# Altium PCB HCHO_Benchmark_B4.PcbDoc
Units mm, origin at the board's own origin, x right, y up, seen from the top; angles counter-clockwise.
Board outline 87.75 x 66 mm, 2 copper layers (Top Layer, Bottom Layer); 49 components, 43 nets, 151 pads, 71 vias.
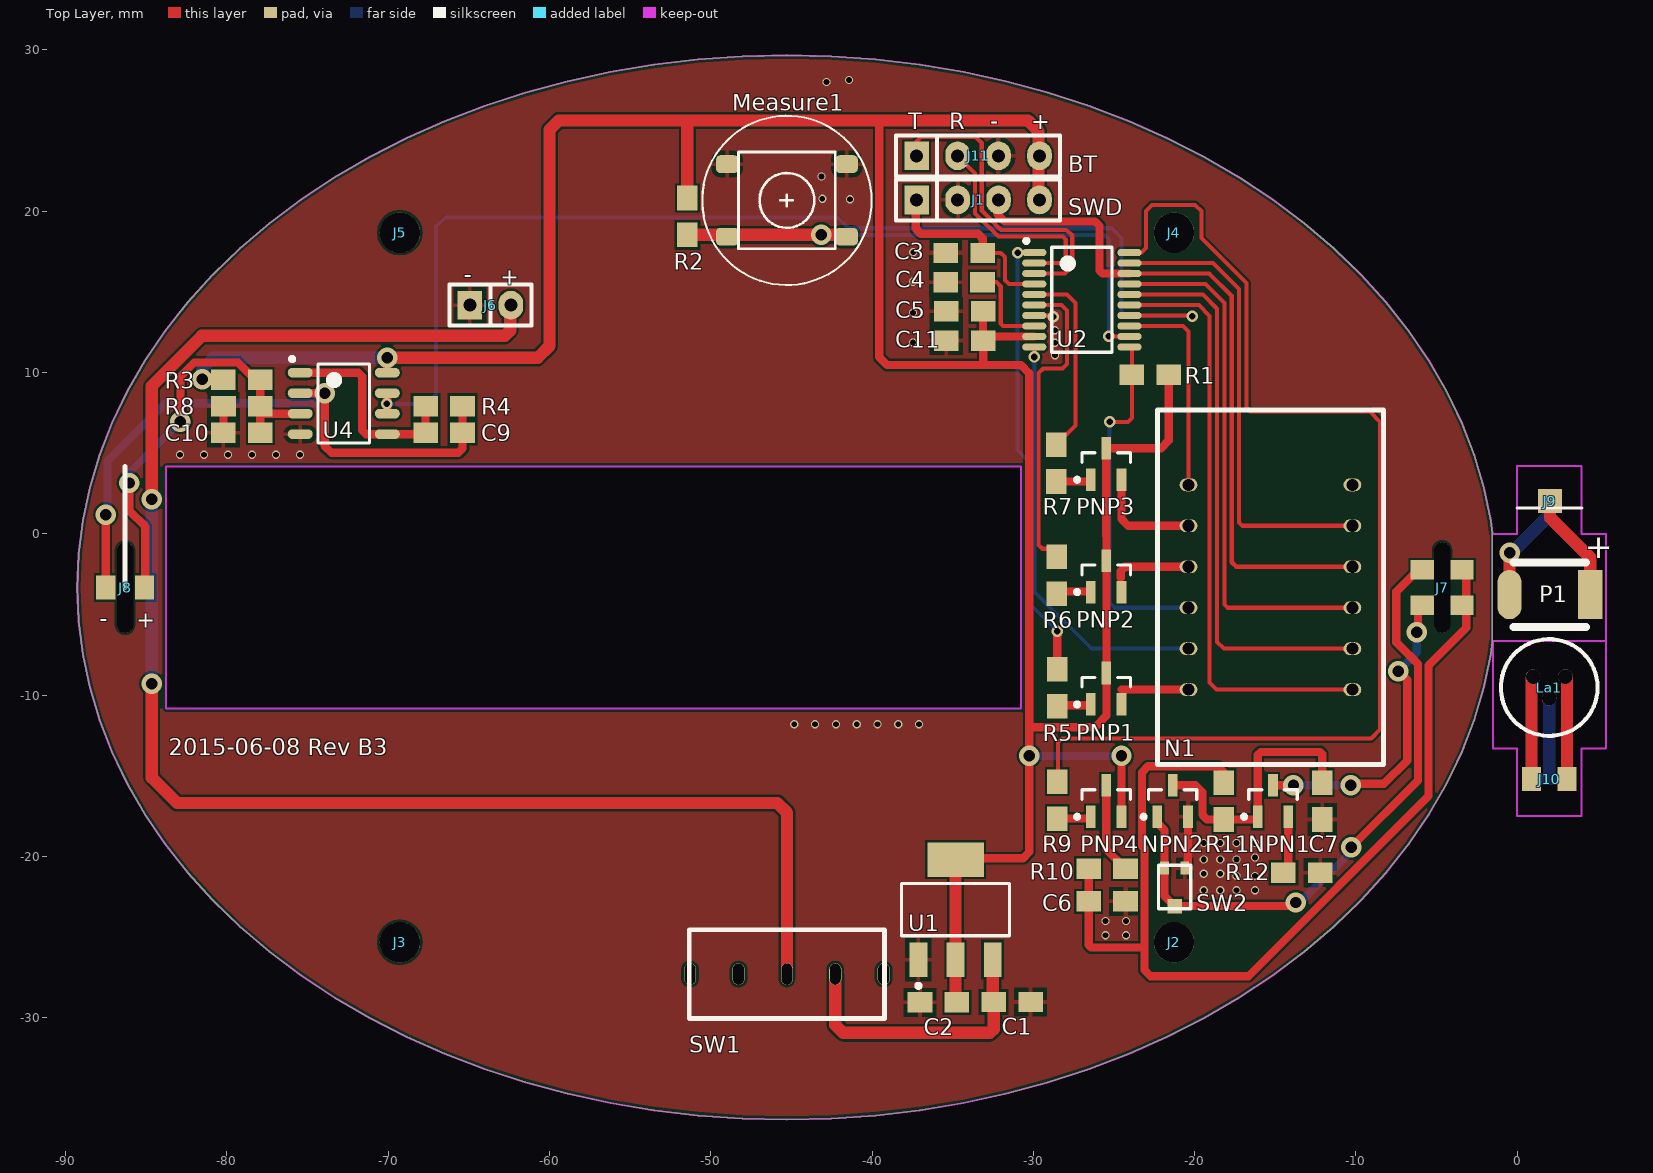
[diagram p0: Top Layer view]
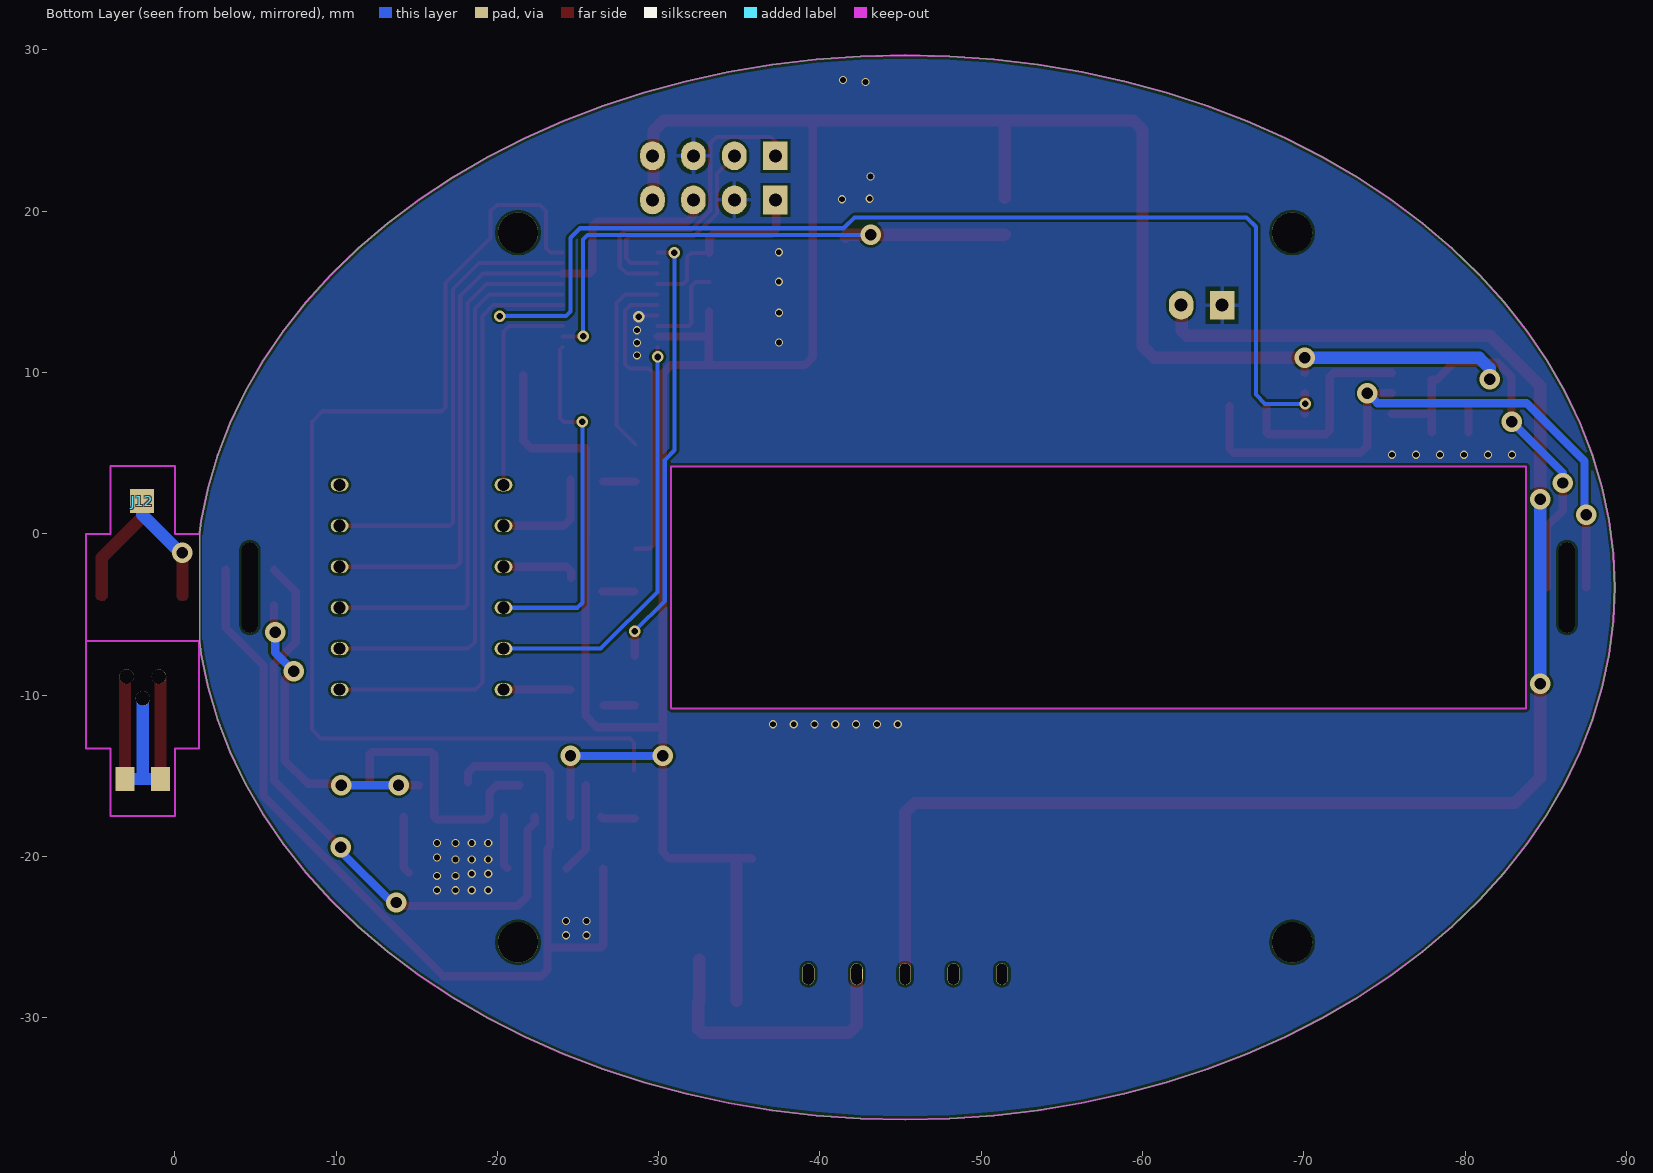
[diagram p1: Bottom Layer view, seen from below]

## Layer stack, top to bottom
Top Layer: signal copper 0.0356
Dielectric: dielectric 0.32, FR-4, Dk 4.8
Bottom Layer: signal copper 0.0356

## Board outline
-82.431,-21.011 -83.838,-19.226 -85.093,-17.379 -86.191,-15.476 -87.127,-13.526 -87.898,-11.535 -88.501,-9.512 -88.933,-7.464 -89.194,-5.4 -89.28,-3.328 -89.194,-1.256 -88.933,0.808 -88.501,2.855 -87.898,4.878 -87.127,6.869 -86.191,8.82 -85.093,10.722 -83.838,12.57 -82.431,14.354 -80.877,16.069 -79.183,17.707 -77.355,19.262 -75.4,20.728 -73.327,22.099 -71.143,23.369 -68.857,24.535 -66.477,25.59 -64.015,26.531 -61.478,27.354 -58.877,28.057 -56.223,28.635 -53.525,29.087 -50.795,29.412 -48.043,29.607 -45.28,29.672 -42.518,29.607 -39.766,29.412 -37.036,29.087 -34.338,28.635 -31.684,28.057 -29.083,27.354 -26.546,26.531 -24.083,25.59 -21.704,24.535 -19.418,23.369 -17.234,22.099 -15.16,20.728 -13.206,19.262 -11.378,17.707 -9.684,16.069 -8.13,14.354 -6.723,12.57 -5.468,10.722 -4.37,8.82 -3.434,6.869 -2.663,4.878 -2.06,2.855 -1.627,0.808 -1.531,0.045 -1.531,0.04 -1.531,-6.703 -1.627,-7.464 -2.06,-9.512 -2.663,-11.535 -3.434,-13.526 -4.37,-15.476 -5.468,-17.379 -6.723,-19.226 -8.13,-21.011 -9.684,-22.725 -11.378,-24.363 -13.206,-25.918 -15.16,-27.384 -17.234,-28.755 -19.418,-30.026 -21.704,-31.191 -24.083,-32.246 -26.546,-33.188 -29.083,-34.011 -31.684,-34.713 -34.338,-35.292 -37.036,-35.744 -39.766,-36.068 -42.518,-36.263 -45.28,-36.328 -48.043,-36.263 -50.795,-36.068 -53.525,-35.744 -56.223,-35.292 -58.877,-34.713 -61.478,-34.011 -64.015,-33.188 -66.477,-32.246 -68.857,-31.191 -71.143,-30.026 -73.327,-28.755 -75.4,-27.384 -77.355,-25.918 -79.183,-24.363 -80.877,-22.725
cut-out: -83.775,4.162 -83.768,4.155 -30.774,4.155 -30.774,-10.813 -30.79,-10.829 -83.775,-10.829

## Design rules (kind name [scope] priority, off if disabled: settings)
Clearance "6mil Special" [(HasFootprint('FPC 0.5mm 4P') OR HasFootprint('FPC 0.5mm 16P') OR HasFootprint('QFN40P500X500X90_HS-41L'))] p1: gap=0.152
Clearance "8mil all" [All] p2: gap=0.152
ComponentClearance [All] p1: gap=-100 collisioncheckmode=3 verticalgap=0.254 showdistances=FALSE
Height [All] p1: minheight=0 maxheight=50.8 prefheight=12.7
HoleSize [All] p1: absolutevalues=TRUE maxlimit=1817.048 minlimit=0 maxpercent=80.000 minpercent=20.000
HoleToHoleClearance [All] p1: gap=0.203 allowstackedmicrovias=TRUE
MinimumSolderMaskSliver [All] p1: minsoldermaskwidth=0
PolygonConnect PolygonConnect_1 [isvia] p1: connectstyle=Direct reliefconductorwidth=0.254 reliefentries=4 polygonreliefangle="90 Angle" airgapwidth=0.254
PolygonConnect [All] p2: connectstyle=Relief reliefconductorwidth=0.254 reliefentries=4 polygonreliefangle="90 Angle" airgapwidth=0.254
RoutingCorners [All] p1: cornerstyle=45-Degree minsetback=0.254 maxsetback=2.54
RoutingVias [All] p1: holewidth=0.356 width=0.508 viastyle="Through Hole" minholewidth=0.356 minwidth=0.508 maxholewidth=2.54 maxwidth=5.08
SilkToSilkClearance [All] p1: silktosilkclearance=0
SilkToSolderMaskClearance [IsPad] p1: minsilkscreentomaskgap=0 clearancetoexposedcopper=TRUE
SolderMaskExpansion [All] p1: expansion=0.102
Width 20mil_Power [(InNet('EP_SUPPLY&VBAT') OR InNet('PSUPPLY') OR InNet('P_3.3V') OR InNet('PSUPPLYBAT') OR InNet('P_3.3V') OR InNet('P_5V'))] p1: maxlimit=1000 minlimit=0.203 preferedwidth=0.508
Width 8mil_Basic [All] p2: maxlimit=100 minlimit=0.203 preferedwidth=0.254
20 further rules are at their usual default settings.

## Components (designator, comment, footprint, x,y, rotation, side; value= is the part's Value field where it differs from the comment)
C1 "10uf" C0805 -31.316,-29.029 r0 top
C2 "10uf" C0805 -35.886,-29.055 r180 top
C3 "1uf" C0805 -34.284,17.411 r0 top
C4 "1uf" C0805 -34.297,15.602 r0 top
C5 "1uf" C0805 -34.257,13.792 r180 top
C6 "1uf" C0805 -25.427,-22.792 r0 top
C7 "1uf" C0805 -12.092,-16.569 r270 top
C9 "1uf" C0805 -66.539,6.271 r0 top
C10 "10uf" C0805 -79.076,6.271 r180 top
C11 "10uf" C0805 -34.252,11.983 r180 top
J1 "CON4" CON4 -33.428,20.702 r0 top
J2 "CON1" 2.5MM -21.28,-25.328 r0 top
J3 "CON1" 2.5MM -69.28,-25.328 r0 top
J4 "CON1" 2.5MM -21.28,18.672 r0 top
J5 "CON1" 2.5MM -69.28,18.672 r0 top
J6 "CON2" CON2 -63.664,14.177 r0 top
J7 "CON2x2_PCB" CON2X2_PCB -4.654,-3.332 r270 top
J8 "CON1X2_PCB" CON1X2_PCB -86.315,-3.332 r90 top
J9 "CON1_PCB" CON1_PCB 2.032,2.032 r0 top
J10 "CON4_PCB" CON4_PCB 1.99,-15.205 r0 top
J11 "CON4" CON4 -33.428,23.436 r0 top
J12 "CON1_PCB" CON1_PCB 2.032,2.032 r0 bottom
La1 "Laser_Header" Laser_Header 1.983,-9.53 r180 top
Measure1 "Patch_6x6x5" PATCH6X6X5 -45.28,20.672 r180 top
N1 "LG3631BH" LG3631BH -15.298,-3.313 r90 top
NPN1 "8050" SOT23-3 -15.14,-16.569 r90 top
NPN2 "8050" SOT23-3 -21.363,-16.569 r90 top
P1 "photodetector" BPW34 2.025,-3.77 r180 top
PNP1 "8550" SOT23-3 -25.484,-9.604 r90 top
PNP2 "8550" SOT23-3 -25.484,-2.639 r90 top
PNP3 "8550" SOT23-3 -25.484,4.326 r90 top
PNP4 "8550" SOT23-3 -25.484,-16.569 r90 top
R1 "10K" R0805 -22.749,9.855 r0 top
R2 "10K" R0805 -51.452,19.678 r90 top
R3 "4.7K" R0805 -79.082,9.567 r180 top
R4 "4.3M" R0805 -66.539,7.923 r180 top
R5 "10K" R0805 -28.516,-9.545 r90 top
R6 "10K" R0805 -28.552,-2.578 r90 top
R7 "10K" R0805 -28.573,4.388 r90 top
R8 "1K" R0805 -79.072,7.923 r0 top
R9 "1K" R0805 -28.516,-16.512 r90 top
R10 "1K" R0805 -25.427,-20.76 r180 top
R11 "1K" R0805 -18.188,-16.569 r90 top
R12 "1K" R0805 -13.362,-21.014 r180 top
SW1 "SS12F44" SS12F44 -45.28,-27.298 r180 top
SW2 "TMC2K2J" TMC2K2J -21.236,-21.903 r180 top
U1 "1117-3.3" SOT223 -34.825,-23.3 r0 top
U2 "STM8S003F3P6" STM8S003F3P6 -26.99,14.511 r0 top
U4 "LMV358" LMV358_SOP -72.754,8.083 r0 top

## Footprints (in the part's own frame and the unit in brackets; to place one, negate y for a bottom-side part, rotate by r counter-clockwise, add the part's x,y. Pads: shape width x height; smd on the part's side, far side on the other; paste and mask are expansions set on the pad)
2.5MM [mm]
  round 2.5 hole 2.5 unplated: 1(0,0)
BPW34 [mm]
  rect 1.5x3.048 smd: A(-2.5,0)
  oval 1.5x3.048 smd: C(2.5,0)
  silkscreen extent -2.25,-2 2.25,2
C0805 [mil]
  rect 60x50 smd: 1(-45,0) 2(45,0)
  body extent -52,-25 55,25, height 31
CON1_PCB [mm]
  rect 1.5x1.5 smd: 1(0,0)
CON1X2_PCB [mm]
  oval 5.6x1 hole 1 slot 5.6 at 0 deg unplated: 0(0,0)
  rect 1.5x1.2 smd: 1(0,1.2) 2(0,-1.2)
CON2 [mil]
  rect 60x70 hole 32: 1(-50,0)
  oval 60x70 hole 32: 2(50,0)
  silkscreen extent -100,-50 100,50, body extent -101,-50 100,50, height 295
CON2X2_PCB [mm]
  oval 5.6x1 hole 1 slot 5.6 at 0 deg unplated: 0(0,0)
  rect 1.2x1.5 smd: 1(-1.1,1.2) 2(-1.1,-1.2) 3(1.1,-1.2) 4(1.1,1.2)
CON4 [mil]
  rect 60x70 hole 32: 1(-150,0)
  oval 60x70 hole 32: 2(-50,0) 3(50,0) 4(150,0)
  silkscreen extent -200,-50 200,50, body extent -201,-50 199,50, height 295
CON4_PCB [mm]
  rect 1.2x1.5 smd far side: 1(-1.1,0) 4(1.1,0)
  rect 1.2x1.5 smd: 2(-1.1,0) 3(1.1,0)
Laser_Header [mm]
  round 0.9 hole 0.9 unplated: 1(-1,-0.675) 2(1,-0.675) 3(0,0.675)
  silkscreen extent -3,-3 3,3, body extent -2.98,-2.99 3,2.99, height 16.7
LG3631BH [mm]
  oval 0.8x1.1 hole 0.75: 1(-6.35,-5.08) 2(-3.81,-5.08) 3(-1.27,-5.08) 4(1.27,-5.08) 5(3.81,-5.08) 6(6.35,-5.08) 7(6.35,5.08) 8(3.81,5.08) 9(1.27,5.08) 10(-1.27,5.08) 11(-3.81,5.08) 12(-6.35,5.08)
  silkscreen extent -11,-7 11,7, body extent -10.98,-6.99 10.99,7, height 7.3
LMV358_SOP [mm] "TSOP, 8-Leads, Body 3.00x3.00mm, Pitch 0.65mm, IPC Medium Density"
  oval 1.55x0.6 smd: 1(-2.7,1.905) 2(-2.7,0.635) 3(-2.7,-0.635) 4(-2.7,-1.905) 5(2.7,-1.905) 6(2.7,-0.635) 7(2.7,0.635) 8(2.7,1.905)
  silkscreen extent -3.32,-2.45 1.6,2.87, body extent -1.95,-2.47 1.93,2.46, height 1.1
PATCH6X6X5 [mm]
  rrect50% 1.4x1.1 smd: 1(-3.7,2.25) 2(3.7,2.25) 3(3.7,-2.25) 4(-3.7,-2.25)
  silkscreen extent -3,-3 3,3, body extent -4.13,-3 4.13,3, height 5
R0805 [mil]
  rect 60x50 smd: 1(-45,0) 2(45,0)
  body extent -52,-25 55,25, height 31
SOT23-3 [mm]
  rect 1.4x0.6 smd: 1(-0.975,0.95) 2(-0.975,-0.95) 3(0.975,0)
  silkscreen extent -1.1,-1.5 0.7,1.92, body extent -0.7,-1.5 0.7,1.5, height 1
SOT223 [mm]
  rect 1.1x2.15 smd: 1(-2.3,-3.1) 2(0,-3.1) 3(2.3,-3.1)
  rect 3.5x2.15 smd: 4(0,3.1)
  silkscreen extent -3.35,-4.85 3.35,1.63, body extent -3.3,-3.2 3.3,3.1, height 1.7
SS12F44 [mm]
  oval 0.75x1.35 hole 0.65 slot 1.3 at 90 deg: 1(-6,0) 2(-3,0) 3(0,0) 4(3,0) 5(6,0)
  silkscreen extent -6.05,-2.75 6.05,2.75, body extent -6.05,-2.75 6.05,2.75, height 11
STM8S003F3P6 [mm]
  oval 1.5x0.45 smd: 1(-2.95,2.925) 2(-2.95,2.275) 3(-2.95,1.625) 4(-2.95,0.975) 5(-2.95,0.325) 6(-2.95,-0.325) 7(-2.95,-0.975) 8(-2.95,-1.625) 9(-2.95,-2.275) 10(-2.95,-2.925) 11(2.95,-2.925) 12(2.95,-2.275) 13(2.95,-1.625) 14(2.95,-0.975) 15(2.95,-0.325) 16(2.95,0.325) 17(2.95,0.975) 18(2.95,1.625) 19(2.95,2.275) 20(2.95,2.925)
  silkscreen extent -3.57,-3.25 1.88,3.77, body extent -2.22,-3.25 2.2,3.24, height 1.2
TMC2K2J [mm]
  rect 0.55x0.8 smd: 1(0.625,-1.175) 2(-0.625,-1.175)
  rect 0.9x0.9 smd: 3(0,1.175)
  silkscreen extent -1,-1.35 1,1.35, body extent -1,-1.35 1.01,1.34, height 0.9

## Part data
C1 C2 C3 C4 C5 C6 C7 C9 C10 C11: library part C
NPN1 NPN2: library part NPN
PNP1 PNP2 PNP3 PNP4: library part PNP
R1 R2 R3 R4 R5 R6 R7 R8 R9 R10 R11 R12: library part R
U1: library part 1117

## Via types
v1: diameter 0.508, hole 0.356, Top Layer to Bottom Layer, 45 vias
v2: diameter 1.27, hole 0.711, Top Layer to Bottom Layer, 18 vias
v3: diameter 0.711, hole 0.406, Top Layer to Bottom Layer, 8 vias

## Nets (pads, with @x,y where several pads share a name; then routed paths per layer and width w, separated by ;. In a path a pad name is that pad's centre, name@x,y a point inside that pad or via, vN(x,y) a via of type N, cw(c..) or ccw(c..) an arc to the next point about the centre after c; other vN are vias at no path point)
C_LASER: R9.2 U2.20 | length 70.3
  Top Layer w0.254: R9.2@-28.475,-14.664 -28.475,-12.93 -28.236,-12.691 -9.05,-12.691 -8.502,-12.143 -8.502,6.932 -9.171,7.602 -16.55,7.602 -16.783,7.835 -16.783,15.544 -19.585,18.346 -19.585,20.007 -19.966,20.388 -22.633,20.388 -23.014,20.007 -23.014,17.721 -23.299,17.436 U2.20
GND: C1.2 C2.2 C3.1 C4.1 C5.2 C6.2 C7.2 C10.2 C11.2 J1.2 J6.1 J11.3 Measure1.3 Measure1.4 NPN2.2 R8.1 R12.1 SW2.2 U1.1 U2.7 U4.4 | length 6.1
  Top Layer w0.254: U2.7 -29.028,13.536 v3@-28.993,13.5
  Top Layer w0.508: C10.2@-80.215,6.275 R8.1 ; SW2.2 -20.413,-20.53 NPN2.2
  Bottom Layer w0.254: v3@-28.993,13.5 v3@-28.754,13.5
  other v1: -25.527,-24.892 -24.257,-24.892 -25.527,-24.003 -24.257,-24.003 -19.431,-22.098 -18.415,-22.098 -17.399,-22.098 -16.256,-22.098 -17.399,-21.209 -16.256,-21.209 -19.431,-21.082 -18.415,-21.082 -19.431,-20.193 -18.415,-20.193 -17.399,-20.193 -16.256,-20.066 -19.431,-19.177 -18.415,-19.177 -17.399,-19.177 -16.256,-19.177 -44.822,-11.811 -43.532,-11.811 -42.243,-11.811 -40.953,-11.811 -39.663,-11.811 -38.374,-11.811 -37.084,-11.811 -82.903,4.897 -81.417,4.897 -79.931,4.897 -78.445,4.897 -76.958,4.897 -75.472,4.897 -28.652,11.063 -37.465,11.862 -28.652,11.843 -28.652,12.623 -37.465,13.707 -37.454,15.628 -37.454,17.461 -41.372,20.743 -43.081,20.78 -43.131,22.152 -42.826,28.008 -41.429,28.135
  other v3: -28.761,13.446
HCHO_ADC: U2.14 U4.6 U4.7 | length 71.2
  Top Layer w0.254: U2.14 -20.191,13.536 v3(-20.155,13.499)
  Top Layer w0.508: U4.6 U4.7
  Bottom Layer w0.254: v3(-70.103,8.056) -67.601,8.056 -67.025,8.633 -67.025,19.039 -66.443,19.621 -42.139,19.621 -41.463,18.945 -25.127,18.945 -24.538,18.356 -24.538,13.784 -24.253,13.499 v3(-20.155,13.499)
LASER_P: C6.1 J7.1 J7.4 R10.2 R11.2 | length 64
  Top Layer w0.508: R10.2 C6.1 -26.57,-25.5 -26.416,-25.654 -23.114,-25.654 ; R11.2 -18.188,-14.791 -18.569,-14.41 -22.887,-14.41 -23.268,-14.791 -23.268,-19.363 -23.114,-19.517 -23.114,-27.051 -22.733,-27.432 -16.665,-27.432 -5.494,-16.261 -5.494,-8.161 -3.154,-5.821 J7.1@-3.154,-2.232
N_A: N1.11 U2.10 | length 26.2
  Top Layer w0.254: v3(-29.94,10.964) U2.10
  Bottom Layer w0.254: v3(-29.94,10.964) -29.923,10.947 -29.923,-3.607 -26.407,-7.123 N1.11
N_B: N1.7 U2.13 | length 13.3
  Top Layer w0.254: U2.13 -20.719,12.886 -20.378,12.545 N1.7
N_C: J1.3 N1.4 U2.18 | length 43.2
  Top Layer w0.254: U2.18 -19.096,16.136 -17.697,14.738 -17.697,-1.763 -17.417,-2.043 N1.4
  Top Layer w0.508: J1.3@-32.215,20.702 -32.215,19.81 -31.777,19.372 -26.189,19.372 -25.898,19.082 -25.898,16.329 -25.705,16.136 U2.18
N_COM1: R5.2 U2.1 | length 27.1
  Top Layer w0.254: v3(-30.978,17.436) U2.1
  Top Layer w0.508: -28.516,-7.58 v3(-28.516,-6.036)
  Bottom Layer w0.254: v3(-30.978,17.436) -30.978,5.181 -30.38,4.583 -30.38,-4.172 v3(-28.516,-6.036)
N_COM2: R6.2 U2.6 | length 19.4
  Top Layer w0.254: U2.6 -28.246,14.186 -27.916,13.856 -27.916,10.53 -28.187,10.259 -29.386,10.259 -29.669,9.976 -29.669,-0.691 -29.434,-0.926 R6.2@-28.552,-0.926
N_COM3: R7.2 U2.5 | length 12
  Top Layer w0.254: U2.5 -27.908,14.836 -27.389,14.318 -27.389,6.715 R7.2
N_D: N1.2 U2.16 | length 35
  Top Layer w0.254: U2.16 -19.495,14.836 -18.612,13.953 -18.612,-6.702 -18.19,-7.123 N1.2
N_DP: N1.3 U2.17 | length 33.1
  Top Layer w0.254: U2.17 -19.32,15.486 -18.155,14.321 -18.155,-4.385 -17.956,-4.583 N1.3
N_E: N1.1 U2.15 | length 37
  Top Layer w0.254: U2.15 -19.741,14.186 -19.069,13.514 -19.069,-9.231 -18.637,-9.663 N1.1
N_F: N1.10 R1.1 U2.11 | length 22.2
  Top Layer w0.254: v3(-25.268,6.942) -24.13,6.942 -23.892,7.18 R1.1 -23.892,11.438 U2.11
  Bottom Layer w0.254: v3(-25.268,6.942) -25.268,-4.276 -24.961,-4.583 N1.10
N_G: N1.5 U2.19 | length 29
  Top Layer w0.254: U2.19 -18.853,16.786 -17.24,15.173 -17.24,0.714 -17.023,0.497 N1.5
NetC1_1: C1.1 SW1.2 U1.3 | length 17.5
  Top Layer w0.762: SW1.2 -42.28,-30.45 -41.792,-30.938 -32.684,-30.938 -32.459,-30.713 C1.1 ; C1.1@-32.525,-28.964 U1.3
NetC4_2: C4.2 U2.8 | length 5.7
  Top Layer w0.254: C4.2 -32.284,15.602 -32.022,15.339 -32.022,13.039 -31.869,12.886 U2.8
NetC7_1: C7.1 NPN1.1 NPN2.3 R11.1 | length 16.8
  Top Layer w0.508: NPN2.3 -19.946,-15.594 -19.513,-16.027 -19.513,-17.424 -19.225,-17.712 R11.1 -16.258,-17.712 NPN1.1 -16.09,-13.709 -15.902,-13.521 -12.219,-13.521 -12.092,-13.648 C7.1
NetC9_2: C9.2 J8.1 R4.1 U4.2 | length 39.3
  Top Layer w0.508: J8.1 v2(-87.515,1.188) ; U4.2 v2(-73.939,8.718) -73.939,5.457 -73.507,5.025 -65.649,5.025 -65.396,5.278 C9.2 R4.1
  Bottom Layer w0.508: v2(-87.515,1.188) -87.413,1.291 -87.413,4.503 -83.816,8.1 -74.557,8.1 v2(-73.939,8.718)
NetC10_1: C10.1 J8.2 R3.1 R8.2 U4.3 | length 26.8
  Top Layer w0.508: v2(-86.061,3.15) -86.061,1.448 -85.059,0.446 J8.2@-85.059,-3.332 ; v2(-82.886,6.96) -82.886,9.754 -82.025,10.615 -79.301,10.615 -78.253,9.567 R3.1 ; C10.1@-77.939,6.276 R3.1 ; R3.1@-77.933,9.562 R3.1 ; R8.2 -77.929,7.448 U4.3
  Bottom Layer w0.508: v2(-86.061,3.15) -86.061,3.785 v2(-82.886,6.96)
NetJ6_2: J6.2 SW1.3 | length 99.7
  Top Layer w0.762: v2(-84.664,-9.296) -84.664,-15.116 -83.085,-16.696 -45.874,-16.696 -45.28,-17.29 SW1.3 ; v2(-84.664,2.134) -84.664,9.17 -81.556,12.279 -62.758,12.279 -62.44,12.597 J6.2@-62.44,14.107
  Bottom Layer w0.762: v2(-84.664,-9.296) v2(-84.664,2.134)
NetJ7_2: J7.2 NPN2.1 SW2.1 SW2.3 | length 38.7
  Top Layer w0.508: NPN2.1 -22.313,-17.926 -21.861,-18.378 SW2.1 -21.861,-22.453 SW2.3 -13.934,-23.078 v2(-13.716,-22.86) ; v2(-10.287,-19.431) -6.154,-15.298 -6.154,-8.07 -7.493,-6.731 -7.493,-3.57 J7.2@-6.154,-2.232
  Bottom Layer w0.508: v2(-13.716,-22.86) -13.589,-22.987 -10.287,-19.685 v2(-10.287,-19.431)
NetJ7_3: J7.3 NPN1.3 | length 19.3
  Top Layer w0.508: NPN1.3 v2(-13.87,-15.594) ; v2(-10.314,-15.594) -10.214,-15.494 -8.255,-15.494 -6.815,-14.054 -6.815,-9.06 v2(-7.366,-8.509) ; v2(-6.223,-6.096) -6.154,-6.027 J7.3@-6.154,-4.432
  Bottom Layer w0.508: v2(-13.87,-15.594) v2(-10.314,-15.594) ; v2(-7.366,-8.509) -6.223,-7.366 v2(-6.223,-6.096)
NetJ9_1: J9.1 P1.A | length 6.8
  Top Layer w0.762: J9.1 2.032,1.016 4.525,-1.477 P1.A
NetJ10_1: 
NetJ10_2: 
NetJ10_3: 
NetJ11_1: J11.1 U2.3 | length 20.1
  Top Layer w0.254: J11.1 -37.238,24.325 -36.958,24.605 -33.58,24.605 -33.199,24.224 -33.199,20.04 -31.998,18.839 -27.941,18.839 -27.586,18.483 -27.586,16.578 -28.028,16.136 U2.3
NetJ11_2: J11.2 U2.2 | length 13.6
  Top Layer w0.254: J11.2 -33.606,22.344 -33.606,19.872 -32.166,18.432 -28.17,18.432 -27.992,18.255 -27.992,17.061 -28.267,16.786 U2.2
NetJ12_1: J12.1 P1.C | length 6.1
  Top Layer w0.762: P1.C v2(-0.475,-1.168)
  Bottom Layer w0.762: v2(-0.475,-1.168) v2@-0.324,-1.168 ; v2@-0.304,-1.168 v2@-0.324,-1.168 ; 2.032,1.188 v2@-0.324,-1.168
NetN1_8: N1.8 PNP3.2 | length 6.8
  Top Layer w0.508: PNP3.2 -24.534,0.916 -24.115,0.497 N1.8
NetN1_9: N1.9 PNP2.2 | length 4.7
  Top Layer w0.508: -24.576,-2.723 -24.576,-2.305 -24.319,-2.048 N1.9@-20.383,-2.048
NetN1_12: N1.12 PNP1.2 | length 4.1
  Top Layer w0.508: -24.534,-9.655 N1.12@-20.386,-9.655
NetNPN1_2: NPN1.2 R12.2 | length 3.6
  Top Layer w0.508: R12.2 -14.19,-20.699 NPN1.2
NetPNP1_1: PNP1.1 R5.1 | length 1.9
  Top Layer w0.508: R5.1@-28.516,-10.628 PNP1.1@-26.587,-10.628
NetPNP2_1: PNP2.1 R6.1 | length 2
  Top Layer w0.508: R6.1@-28.509,-3.586 PNP2.1@-26.508,-3.586
NetPNP3_1: PNP3.1 R7.1 | length 2
  Top Layer w0.508: R7.1 PNP3.1@-26.54,3.245
NetPNP4_1: PNP4.1 R9.1 | length 2.1
  Top Layer w0.508: R9.1 -26.546,-17.655 PNP4.1
NetPNP4_3: PNP4.3 R10.1 | length 5.7
  Top Layer w0.508: PNP4.3 -25.484,-19.559 R10.1
NRESET: C3.2 J1.1 U2.4 | length 11.9
  Top Layer w0.254: C3.2 -32.02,17.411 -31.76,17.15 -31.76,15.724 -31.522,15.486 U2.4
  Top Layer w0.508: J1.1@-37.295,20.702 -37.295,18.921 -36.984,18.61 -33.428,18.61 -33.141,18.323 C3.2
OUT1: C9.1 R4.2 U4.1 U4.5 | length 12.9
  Top Layer w0.508: U4.1 -71.845,9.988 -71.616,9.759 -71.616,6.425 -71.369,6.178 U4.5 C9.1@-67.775,6.178 ; C9.1 R4.2
P_3.3V: C2.1 C5.1 C11.1 J1.4 J11.4 PNP1.3 PNP2.3 PNP3.3 PNP4.2 R1.2 R2.2 R3.2 U1.2 U1.4 U2.9 U4.8 | length 191.4
  Top Layer w0.508: U4.8 v2(-70.054,10.916) ; -39.557,25.62 -39.557,10.954 -39.069,10.466 -33.109,10.466 ; U1.4@-35.79,-20.169 U1.4@-35.739,-20.118 ; U1.4@-35.739,-20.114 U1.4@-35.739,-20.118 ; C11.1@-33.114,11.988 C5.1 ; -30.178,-11.997 -26.189,-11.997 -25.468,-11.277 -25.468,-0.114 -25.484,-0.098 PNP3.3 -22.082,5.301 -21.606,5.777 R1.2 ; U2.9 -32.856,12.236 C11.1 -33.109,10.466 ; PNP4.2 v2(-24.534,-13.771) ; U1.4@-35.739,-20.118 -30.637,-20.118 -30.253,-19.735 v2(-30.253,-13.771) -30.253,9.952 -30.767,10.466 -33.109,10.466
  Top Layer w0.762: v2(-70.054,10.916) -60.728,10.916 -59.999,11.644 -59.999,25.049 -59.428,25.62 -51.45,25.62 ; R2.2 -51.452,25.619 -51.45,25.62 ; C2.1@-34.825,-28.973 U1.2 U1.4 ; J1.4@-29.675,20.702 -29.675,24.968 -30.327,25.62 -39.557,25.62 -51.45,25.62
  Bottom Layer w0.508: v2@-30.249,-13.771 v2(-24.534,-13.771)
  Bottom Layer w0.762: v2(-81.531,9.574) -81.531,10.258 -80.873,10.916 v2(-70.054,10.916)
TRRIGLE: Measure1.1 Measure1.2 R2.1 U2.12 | length 35.2
  Top Layer w0.254: v3(-25.313,12.236) U2.12
  Top Layer w0.762: R2.1 -41.693,18.535 Measure1.1
  Bottom Layer w0.254: v2(-43.155,18.539) -25.602,18.539 -25.313,18.25 v3(-25.313,12.236)
pads on no net: J2.1 J3.1 J4.1 J5.1 J7.0 J8.0 J10.1 J10.2 J10.3 J10.4 La1.1 La1.2 La1.3 N1.6 SW1.1 SW1.4 SW1.5
copper on no net: | length 20
  Top Layer w0.762: 0.89,-15.205 0.89,-8.948 0.983,-8.855 ; 2.983,-8.855 3.09,-8.962 3.09,-15.205
  Bottom Layer w0.762: 0.89,-15.205 3.09,-15.205 ; 1.983,-15.198 1.983,-10.205

## Polygon pours and split planes (outlines as drawn)
GND on Bottom Layer "Bottom Layer-No Net" (solid, remove dead copper, pour order 6): -94.519,32.074 9.24,32.074 9.367,32.201 9.494,32.074 9.494,-39.808 -94.519,-39.808 -94.646,-39.681
GND on Top Layer "Bottom Layer-No Net" (solid, remove dead copper, pour order 8): -96.401,34.701 16.817,34.701 16.817,-45.49 16.69,-45.618 14.65,-43.569 -96.146,-43.569

## Keep-outs
Keep-Out Layer:
  lines w0.01: -1.531,-6.703 -1.531,0.04
  lines w0.127: -83.775,4.162 -30.774,4.162 ; -83.775,4.166 -83.775,-10.829 -30.79,-10.829 -30.774,-10.813 -30.774,4.155 ; -1.531,-6.703 -1.627,-7.464 -2.06,-9.512 -2.663,-11.535 -3.434,-13.526 -4.37,-15.476 -5.468,-17.379 -6.723,-19.226 -8.13,-21.011 -9.684,-22.725 -11.378,-24.363 -13.206,-25.918 -15.16,-27.384 -17.234,-28.755 -19.418,-30.026 -21.704,-31.191 -24.083,-32.246 -26.546,-33.188 -29.083,-34.011 -31.684,-34.713 -34.338,-35.292 -37.036,-35.744 -39.766,-36.068 -42.518,-36.263 -45.28,-36.328 -48.043,-36.263 -50.795,-36.068 -53.525,-35.744 -56.223,-35.292 -58.877,-34.713 -61.478,-34.011 -64.015,-33.188 -66.477,-32.246 -68.857,-31.191 -71.143,-30.026 -73.327,-28.755 -75.4,-27.384 -77.355,-25.918 -79.183,-24.363 -80.877,-22.725 -82.431,-21.011 -83.838,-19.226 -85.093,-17.379 -86.191,-15.476 -87.127,-13.526 -87.898,-11.535 -88.501,-9.512 -88.933,-7.464 -89.194,-5.4 -89.28,-3.328 -89.194,-1.256 -88.933,0.808 -88.501,2.855 -87.898,4.878 -87.127,6.869 -86.191,8.82 -85.093,10.722 -83.838,12.57 -82.431,14.354 -80.877,16.069 -79.183,17.707 -77.355,19.262 -75.4,20.728 -73.327,22.099 -71.143,23.369 -68.857,24.535 -66.477,25.59 -64.015,26.531 -61.478,27.354 -58.877,28.057 -56.223,28.635 -53.525,29.087 -50.795,29.412 -48.043,29.607 -45.28,29.672 -42.518,29.607 -39.766,29.412 -37.036,29.087 -34.338,28.635 -31.684,28.057 -29.083,27.354 -26.546,26.531 -24.083,25.59 -21.704,24.535 -19.418,23.369 -17.234,22.099 -15.16,20.728 -13.206,19.262 -11.378,17.707 -9.684,16.069 -8.13,14.354 -6.723,12.57 -5.468,10.722 -4.37,8.82 -3.434,6.869 -2.663,4.878 -2.06,2.855 -1.627,0.808 -1.531,0.045 ; -1.5,0 0,0 0,4.191 4,4.191 4,0 5.5,0 5.5,-6.65 ; -1.5,-6.65 5.5,-6.65 ; -1.5,-6.65 -1.5,-13.3 0,-13.3 0,-17.491 4,-17.491 4,-13.3 5.5,-13.3 5.5,-6.65 ; -1.5,-6.65 5.5,-6.65

## Silkscreen, mask and mechanical layers (free items; w line width, h text height)
Top Overlay:
  circle w0.127: c-45.28,20.672 r5.25
  lines w0.2: 0,1.6 4,1.6
  lines w0.3: -86.315,-3.332 -86.315,4.166
  text "T" at -37.746,25.087 h1.02
  text "R" at -35.206,25.087 h1.02
  text "-" at -32.666,25.087 h1.02
  text "+" at -30.126,25.087 h1.02
  text "BT" at -27.84,22.42 h1.02
  text "SWD" at -27.84,19.753 h1.02
  text "+" at -62.887,16.464 h1.02 r270
  text "-" at -65.305,15.562 h1.02
  text "+" at 4.191,-1.524 h1.52
  text "-" at -87.376,-4.953 h1.02 r180
  text "+" at -84.455,-4.953 h1.02 r180
  text "2015-06-08 Rev B3" at -83.622,-13.736 h1.02

## Text inside footprints (layer, text, board x,y; h text height)
U4: Mechanical 15 "1" at -72.304,7.918 h0.75 r90